# Altium PCB PCB1.PcbDoc
Units mm, origin at the board's own origin, x right, y up, seen from the top; angles counter-clockwise.
Board outline 152.4 x 101.6 mm, 2 copper layers (Top Layer, Bottom Layer); 34 components, 23 nets, 104 pads, 0 vias.
Unrouted connection lines stored in the file: 72.
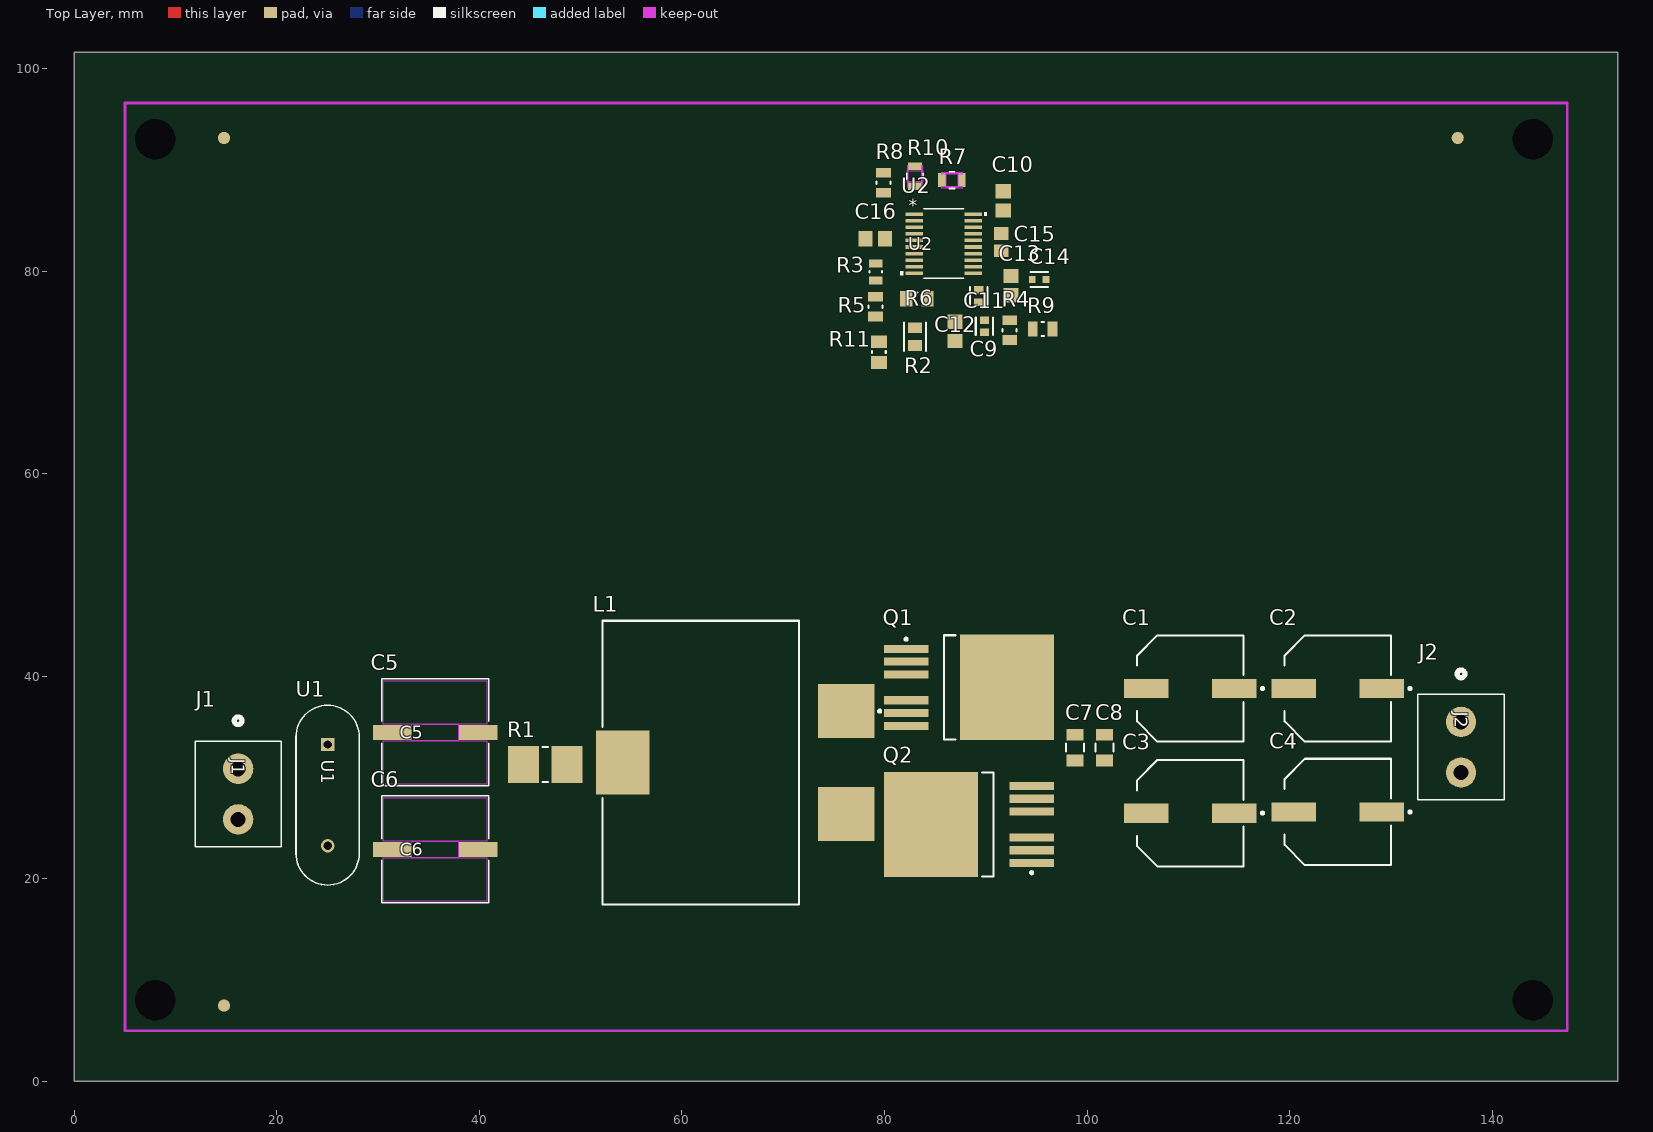
[diagram p0: Top Layer view]
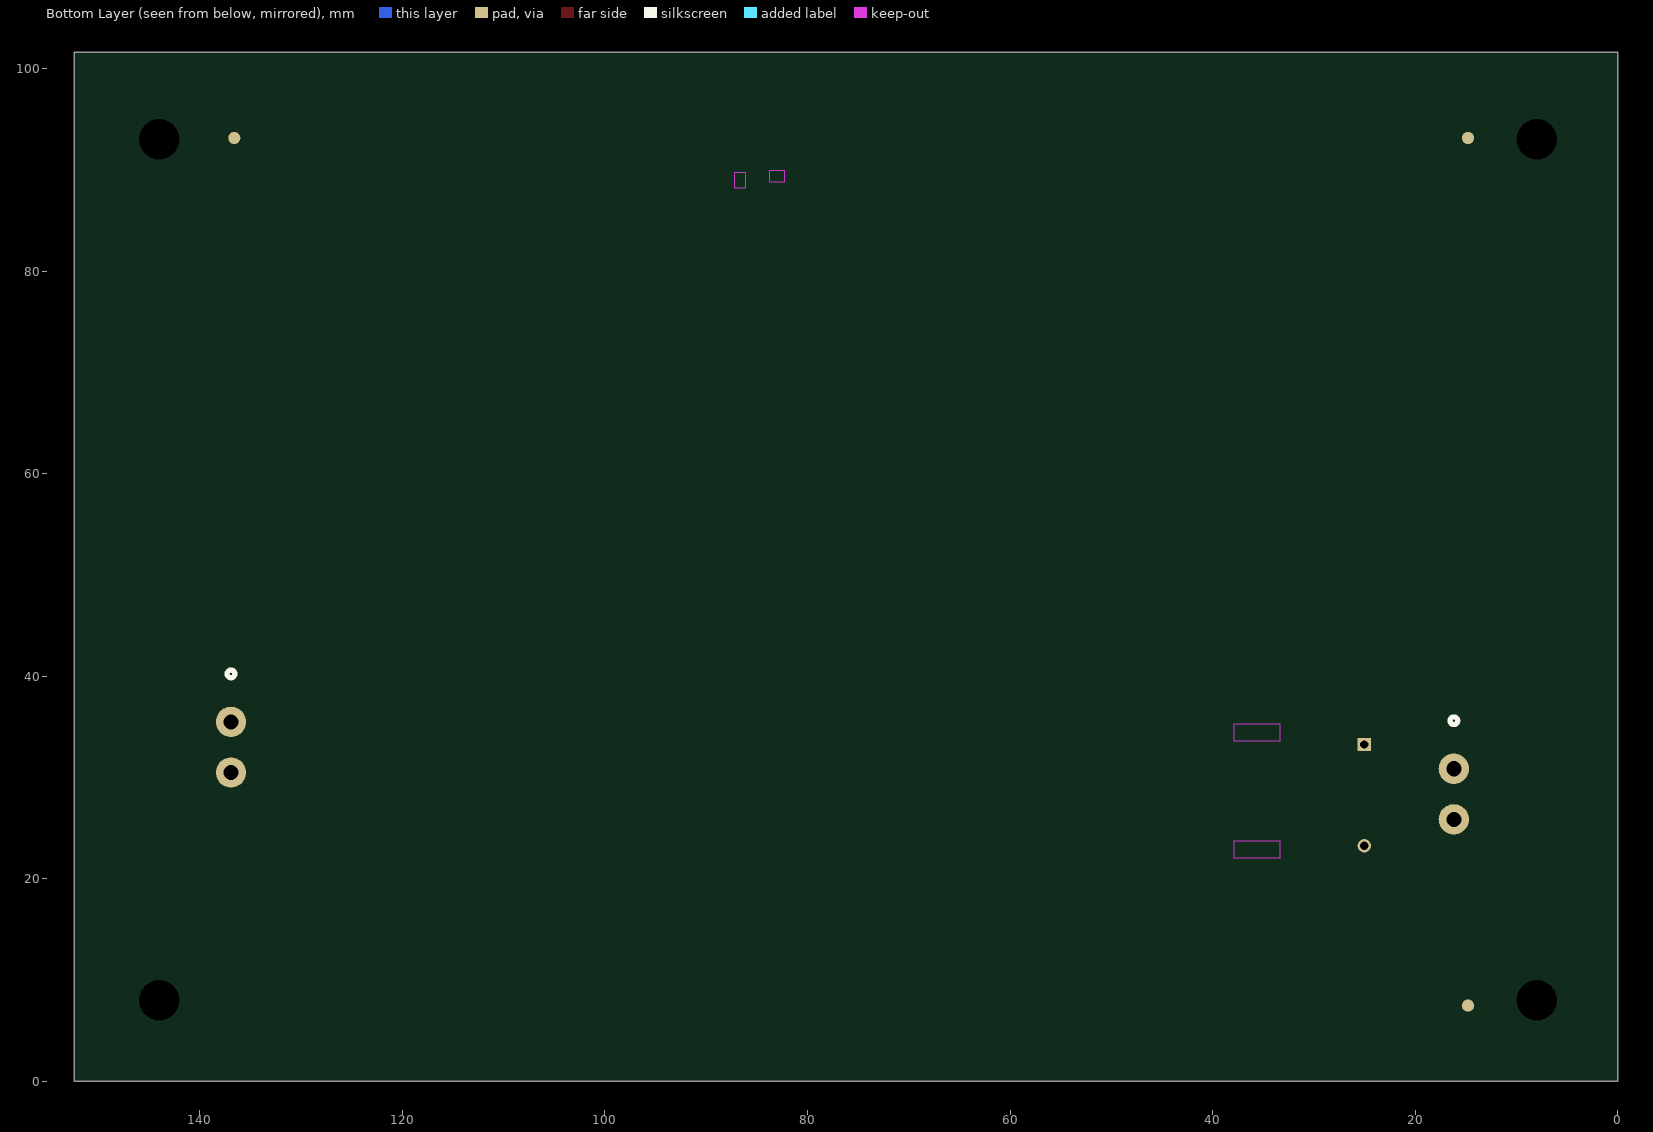
[diagram p1: Bottom Layer view, seen from below]

## Layer stack, top to bottom
Top Solder: solder mask 0.0102, Solder Resist, Dk 3.5
Top Layer: signal copper 0.0356
Dielectric 1: dielectric 0.32, FR-4, Dk 4.8
Bottom Layer: signal copper 0.0356
Bottom Solder: solder mask 0.0102, Solder Resist, Dk 3.5

## Board outline
0,0 152.4,0 152.4,101.6 0,101.6

## Design rules (kind name [scope] priority, off if disabled: settings)
Clearance [All] p1: gap=0.3 ignorepadtopadclearanceinfootprint=FALSE
HoleSize [All] p1: absolutevalues=TRUE maxlimit=6 minlimit=0.5 maxpercent=80.000 minpercent=20.000
PolygonConnect [All] p1: connectstyle=Relief reliefconductorwidth=0.254 reliefentries=4 polygonreliefangle="90 Angle" airgapwidth=0.254
RoutingVias [All] p1: holewidth=0.3 width=0.6 viastyle="Through Hole" minholewidth=0.25 minwidth=0.5 maxholewidth=2.5 maxwidth=5
SolderMaskExpansion [All] p1: expansion=0.12 istentingtop=FALSE
SupplyNets "Schematic Supply Nets_1" [InNet('GND')] p1: voltage=0.000
Width [All] p1: maxlimit=10 minlimit=0.254 preferedwidth=0.3 minimp=50.000000 maximp=50.000000 favimp=50.000000
29 further rules are at their usual default settings.

## Components (designator, comment, footprint, x,y, rotation, side; value= is the part's Value field where it differs from the comment)
C1 "35SVPF120M" FP-OS-CON-SMT-F12-MFG 110.204,38.786 r180 top
C2 "35SVPF120M" FP-OS-CON-SMT-F12-MFG 124.756,38.786 r180 top
C3 "35SVPF120M" FP-OS-CON-SMT-F12-MFG 110.204,26.467 r180 top
C4 "35SVPF120M" FP-OS-CON-SMT-F12-MFG 124.756,26.594 r180 top
C5 "UCD1V471MNL6GS" CAP_UCD_10X13P5_NCH 35.636,34.442 r0 top
C6 "UCD1V471MNL6GS" CAP_UCD_10X13P5_NCH 35.636,22.885 r0 top
C7 "GRM31CR71H475KA12L" FP-GRM31C-0_2-e0_3_0_8-IPC_C 98.806,32.944 r270 top
C8 "GRM31CR71H475KA12L" FP-GRM31C-0_2-e0_3_0_8-IPC_C 101.727,32.944 r270 top
C9 "C0603C223K5RACTU" FP-C0603C-CF-MFG 89.865,74.559 r270 top value="22,000 pF"
C10 "GRM21BR71H104KA01L" CAPC2013X135X45ML10T25 91.719,86.929 r90 top
C11 "C0603C331K5RACTU" FP-C0603C-CF-MFG 89.306,77.537 r270 top value="330 pF"
C12 "GRM21BR71H104KA01L" CAPC2013X135X45ML10T25 86.97,74.041 r90 top
C13 "GRM21BR71H104KA01L" CAPC2013X135X45ML10T25 92.481,78.562 r90 top
C14 "GRM188R71E474KA12D" FP-GRM188-0_1-e0_2_0_5-MFG 95.275,79.172 r180 top
C15 "GRM21BR71E105KA99L" CAPC2013X140X45NL15T25 91.516,82.855 r90 top
C16 "GRM21BR71H104KA01L" CAPC2013X135X45ML10T25 79.085,83.185 r0 top
J1 "1729018" CONN_1729018_PXC 16.18,30.857 r270 top
J2 "1729018" CONN_1729018_PXC 136.931,35.484 r270 top
L1 "7443641500" WE-HCF_2818 61.873,31.47 r90 top
Q1 "IPB017N06N3 G" INF-PG-TO-263-7-2_N 88.332,38.887 r0 top
Q2 "IPB017N06N3 G" INF-PG-TO-263-7-2_N 88.332,25.349 r180 top
R1 "WSLP25122L000FEA" FP-WSLP2512-0R001-0R0049-MFG 46.507,31.267 r0 top
R2 "CR0805-FX-1913ELF" FP-CR0805-IPC_B 83.007,73.521 r270 top
R3 "CRCW080549K9FKEA" FP-CRCW0805-e3-IPC_C 79.146,79.908 r270 top
R4 "CRCW080568K1FKEA" FP-CRCW0805-e3-MFG 92.354,74.168 r270 top
R5 "CRCW08058K06FKEA" FP-CRCW0805-e3-MFG 79.121,76.489 r270 top
R6 "CRCW080510K0FKEA" FP-CRCW0805-e3-IPC_A 83.194,77.267 r0 top
R7 "CRCW08054R70FKEAHP" RES_CRCW_0805_VIS 86.665,88.976 r0 top
R8 "CRCW0805100KFKEA" FP-CRCW0805-e3-MFG 79.908,88.722 r90 top
R9 "CRCW08058K06FKEA" FP-CRCW0805-e3-MFG 95.615,74.27 r180 top
R10 "CRCW08054R70FKEAHP" RES_CRCW_0805_VIS 83.007,89.357 r90 top
R11 "CRCW080536K5FKEA" RESC2013X50X30ML20T20 79.451,71.993 r90 top
U1 "MF72-001.5D15" MF72-001.5D15_CTM 25.019,28.245 r270 top
U2 "LM5122QMHX/NOPB" PWP20_3P0X4P2-M 85.847,82.702 r0 top

## Footprints (in the part's own frame and the unit in brackets; to place one, negate y for a bottom-side part, rotate by r counter-clockwise, add the part's x,y. Pads: shape width x height; smd on the part's side, far side on the other; paste and mask are expansions set on the pad)
CAP_UCD_10X13P5_NCH [mil]
  rect 150x59 smd paste+0 mask+0: 1(-167.5,0) 2(167.5,0)
  Top Layer keep-out region: -90.5,-31.5 -90.5,31.5 90.5,31.5 90.5,-31.5
  Top Layer keep-out region: -201,31.5 -201,201 201,201 201,31.5
  Top Layer keep-out region: -201,-201 -201,-31.5 201,-31.5 201,-201
  Keep-Out Layer region: -90.5,-31.5 -90.5,31.5 90.5,31.5 90.5,-31.5
  silkscreen extent -208,-208 208,208, body extent -222,-203 222,203, height 553
CAPC2013X135X45ML10T25 [mm] "Chip Capacitor, 2-Leads, Body 2.10x1.35mm, IPC Low Density"
  rect 1.4x1.5 smd: 1(-0.95,0) 2(0.95,0)
  body extent -1.05,-0.67 1.05,0.67, height 1.35
CAPC2013X140X45NL15T25 [mm] "Chip Capacitor, 2-Leads, Body 2.00x1.25mm, IPC Medium Density"
  rect 1.25x1.45 smd: 1(-0.85,0) 2(0.85,0)
  body extent -1.08,-0.7 1.07,0.7, height 1.4
CONN_1729018_PXC [mm]
  round 3 hole 1.5 paste-2539.97 mask+0: 1(0,0) 2(5,0)
  silkscreen extent -5.12,-4.25 7.71,4.25
FP-C0603C-CF-MFG [mm]
  rect 0.75x0.9 smd paste+0 mask+0: 1(-0.6,0) 2(0.6,0)
  silkscreen extent -0.87,-0.85 0.88,0.85, body extent -1.2,-0.6 1.2,0.6, height 0.25
FP-CR0805-IPC_B [mm]
  rect 1.058x1.362 smd paste+0 mask+0: 1(-0.877,0) 2(0.877,0)
  silkscreen extent -1.41,-1.08 1.41,1.08, body extent -1.66,-0.93 1.66,0.93, height 0.25
FP-CRCW0805-e3-IPC_A [mil]
  rect 47.5x59.38 smd paste+0 mask+0: 1(-41.37,0) 2(41.37,0)
  silkscreen extent -3,-25 3,25, body extent -85,-49 85,49, height 10
FP-CRCW0805-e3-IPC_C [mil]
  rect 31.75x51.5 smd paste+0 mask+0: 1(-33.5,0) 2(33.5,0)
  silkscreen extent -3,-25 3,25, body extent -53,-31 53,31, height 10
FP-CRCW0805-e3-MFG [mm]
  rect 0.95x1.45 smd paste+0 mask+0: 1(-0.975,0) 2(0.975,0)
  silkscreen extent -0.13,-0.7 0.13,0.7, body extent -1.55,-0.82 1.55,0.82, height 0.25
FP-GRM31C-0_2-e0_3_0_8-IPC_C [mm]
  rect 1.155x1.706 smd paste+0 mask+0: 1(-1.276,0) 2(1.276,0)
  silkscreen extent -0.4,-0.9 0.4,0.9, body extent -1.95,-1 1.95,1, height 0.25
FP-GRM188-0_1-e0_2_0_5-MFG [mm]
  rect 0.65x0.7 smd paste+0 mask+0: 1(-0.675,0) 2(0.675,0)
  silkscreen extent -0.85,-0.75 0.85,0.75, body extent -1.1,-0.55 1.1,0.55, height 0.25
FP-OS-CON-SMT-F12-MFG [mm]
  rect 4.4x1.9 smd paste+0 mask+0: 1(-4.35,0) 2(4.35,0)
  silkscreen extent -7.25,-5.25 5.25,5.25, body extent -6.8,-5.5 6.8,5.5, height 0.25
FP-WSLP2512-0R001-0R0049-MFG [mm]
  rect 3.05x3.68 smd paste+0 mask+0: 1(-2.16,0) 2(2.16,0)
  silkscreen extent -0.26,-1.72 0.26,1.72, body extent -3.78,-1.94 3.78,1.94, height 0.25
INF-PG-TO-263-7-2_N [mm] "DPAK, 7-Leads, Body 10.1x8.98mm, Pitch 1.27mm, IPC Medium Density"
  rect 4.4x0.8 smd: 1(-6.2,3.81) 2(-6.2,2.54) 3(-6.2,1.27) 5(-6.2,-1.27) 6(-6.2,-2.54) 7(-6.2,-3.81)
  rect 9.3x10.4 smd: 4(3.75,0)
  silkscreen extent -6.32,-5.15 -1.3,5.15, body extent -2.45,-5.15 7,5.15, height 4.57
MF72-001.5D15_CTM [mil]
  rect 52x52 hole 32 paste-99999 mask+0: 1(-196.85,0)
  round 52 hole 32 paste-99999 mask+0: 2(196.85,0)
  silkscreen extent -349,-123 349,123
PWP20_3P0X4P2-M [mm]
  rect 1.716x0.351 smd paste+0 mask+0: 1(-2.901,2.925) 2(-2.901,2.275) 3(-2.901,1.625) 4(-2.901,0.975) 5(-2.901,0.325) 6(-2.901,-0.325) 7(-2.901,-0.975) 8(-2.901,-1.625) 9(-2.901,-2.275) 10(-2.901,-2.925) 11(2.901,-2.925) 12(2.901,-2.275) 13(2.901,-1.625) 14(2.901,-0.975) 15(2.901,-0.325) 16(2.901,0.325) 17(2.901,0.975) 18(2.901,1.625) 19(2.901,2.275) 20(2.901,2.925)
  silkscreen extent -4.27,-3.43 4.27,3.43, body extent -3.2,-3.3 3.2,3.3, height 1.1
RES_CRCW_0805_VIS [mil]
  rect 30x55 smd paste+0 mask+0: 1(-38.5,0) 2(38.5,0)
  Top Layer keep-out region: -41.5,-25.5 -41.5,-29.5 41.5,-29.5 41.5,-25.5
  Top Layer keep-out region: -41.5,29.5 -41.5,25.5 41.5,25.5 41.5,29.5
  Top Layer keep-out region: -21.5,-29.5 -21.5,29.5 21.5,29.5 21.5,-29.5
  Keep-Out Layer region: -21.5,-29.5 -21.5,29.5 21.5,29.5 21.5,-29.5
  silkscreen extent -11,-32 11,32, body extent -44,-27 44,27, height 20
RESC2013X50X30ML20T20 [mm] "Chip Resistor, 2-Leads, Body 2.00x1.25mm, IPC Low Density"
  rect 1.25x1.55 smd: 1(-1.025,0) 2(1.025,0)
  silkscreen extent -0.1,-0.67 0.1,0.67, body extent -1.1,-0.72 1.1,0.72, height 0.5
WE-HCF_2818 [mm] "SMD High Current Inductor, body 28x19.4mm"
  rect 5.33x5.59 smd: 1(-5.075,-14.355) 2(5.075,-14.355)
  rect 6.35x5.28 smd: 3(0,7.72)
  silkscreen extent -14,-17.77 14,9.7, body extent -14,-16.4 14,10.6, height 18.55

## Part data
C1 C2 C3 C4: library part CMP-05428-000082-1, "Conductive Polymer Aluminum Solid Capacitors (OS-CON) 120uF ±20% 35V RADIAL SMT 10x12.6mm", Capacitance=120uF, Case/Package=Radial, ESR (Equivalent Series Resistance)=18mR, Leakage Current=840uA, Max Operating Temperature=105°C, Min Operating Temperature=-55°C, Package Quantity=400, Ripple Current=4.4A, Tolerance=20%, Voltage=35V, Diameter=10mm, Dissipation Factor=12%, Height=12.6mm, Height - Seated (Max)=0.5inch, Lead Free="Lead Free", Length=12.6mm, Life (Hours)=5000Hour, Mount="Surface Mount", Number of Pins=12, Packaging="Tape and Reel", Polarity=Polar, REACH SVHC="No SVHC", Ripple Current (AC)=4.4A, RoHS Compliant=Yes, Series="OS-CON™, SVPF", Termination=SMD/SMT, Voltage Rating=35V, Voltage Rating (DC)=35V
C5 C6: "No Description Available", Manufacturer_Name=Nichicon, Copyright="Copyright (C) 2026 Ultra Librarian. All rights reserved.", Manufacturer_Part_Number=UCD1V471MNL6GS
C7 C8: library part CMP-1037-04923-3, "Chip Multilayer Ceramic Capacitors for General Purpose, 1206, 4.7uF, X7R, 15%, 10%, 50V", Capacitance=4.7uF, Case Code (Imperial)=1206, Case Code (Metric)=3216, Dielectric=X7R, Max Operating Temperature=125°C, Min Operating Temperature=-55°C, Package Quantity=2000, Tolerance=10%, Voltage=50V, Case/Package=1206, Depth=1.6mm, Height=1.6mm, Lead Free="Lead Free", Length=3.2mm, Material=Ceramic, Mount="Surface Mount", Packaging="Tape and Reel", Radiation Hardening=No, REACH SVHC="No SVHC", Termination=SMD/SMT, Thickness=0.071inch, Voltage Rating=50V, Voltage Rating (DC)=50V, Width=0.063inch
C9: library part CMP-2006-03879-3, "Ceramic Capacitor 0.022Uf 50V, X7R, 10%, 0603, Full Reel", Capacitance="22,000 pF", Manufacturer=KEMET, Package=C0603C-CF, Temperature="-55°C to +125°C", Temperature Characteristic=X7R, Temperature Coefficient=30ppm/°C, Temperature Range High=+125°C, Temperature Range Low=-55°C, Tolerance=0.1, Voltage Rating="50 V", Automotive=Yes, Automotive Grade="Grade 1", Category=Cap, ComponentLink2Description=Datasheet, ComponentLink2URL=https://api.kemet.com/component-edge/download/datasheet/C0603C100J5GACAUTO.pdf, Device Class L1="Passive Components", Device Class L2=Capacitors, Device Class L3="Ceramic Capacitors", Digikey Description="Ceramic Capacitor 0.022Uf 50V, X7R, 10%, 0603, Full Reel", Height=0.87mm, Lead Free=Yes, Manufacturer Part Number=C0603C223K5RACTU, Material=Ceramic, Mouser Description="Capacitor; Ceramic; Cap; .022uF; Tol+10%; SMT; Vol-Rtg 50V; X7R; TR", Octopart=https://octopart.com/c0603c223k5ractu-kemet-97352, RoHS=TRUE
C10 C12 C13 C16: library part CMP-2100-03644-1, "Chip Capacitor, 0.1 uF, +/- 10%, 50 V, -55 to 125 degC, 0805 (2012 Metric), RoHS, Tape and Reel", Capacitance=100nF, Case Code (Imperial)=0805, Case Code (Metric)=2012, Dielectric=X7R, Dielectric Material=Ceramic, Insulation Resistance=10GR, Manufacturer=Murata, Max Operating Temperature=125degC, Min Operating Temperature=-55degC, Package Description="2-Pin Surface Mount Device, Body 2 x 1.25 mm", Package Quantity=1, Tolerance=10%, Voltage=50V, Case/Package=0805, Datasheet URL=http://psearch.en.murata.com/capacitor/product/GRM21BR71H104KA01%23.pdf, Datasheet Version=42675.0, Depth=1.25mm, Height=1.25mm, Lead Free=LeadFree, Length=2mm, Manufacturer URL=http://www.murata.com/, Material=Ceramic, Mount=SurfaceMount, Number of Pins=2, Package Reference=0805, Packaging=TapeandReel, Radiation Hardening=No, REACH SVHC=Unknown, RoHSCompliant=true, Termination=SMD/SMT, Thickness=0.053inch, Voltage Rating=50V, Voltage Rating (DC)=50V, Width=0.049inch
C11: library part CMP-2006-03173-2, "CAP CER 330PF 50V X7R 0603", Capacitance="330 pF", Manufacturer=KEMET, Package=C0603C-CF, Temperature="-55°C to +125°C", Temperature Characteristic=X7R, Temperature Coefficient=30ppm/°C, Temperature Range High=+125°C, Temperature Range Low=-55°C, Tolerance=0.1, Voltage Rating="50 V", Automotive=Yes, Automotive Grade="Grade 1", Category=Cap, ComponentLink2Description=Datasheet, ComponentLink2URL=https://api.kemet.com/component-edge/download/datasheet/C0603C100J5GACAUTO.pdf, Device Class L1="Passive Components", Device Class L2=Capacitors, Device Class L3="Ceramic Capacitors", Digikey Description="CAP CER 330PF 50V X7R 0603", Height=0.87mm, Lead Free=Yes, Manufacturer Part Number=C0603C331K5RACTU, Material=Ceramic, Mouser Description="Multilayer Ceramic Capacitors MLCC - SMD/SMT 50volts 330pF X7R 10%", Octopart=https://octopart.com/c0603c331k5ractu-kemet-132411, RoHS=TRUE
C14: library part CMP-06035-003857-1, "Chip Multilayer Ceramic Capacitors for General Purpose, 0603, 0.47uF, X7R, 15%, 10%, 25V", Capacitance=470nF, Case Code (Imperial)=0603, Case Code (Metric)=1608, Dielectric=X7R, Max Operating Temperature=125°C, Min Operating Temperature=-55°C, Package Quantity=4000, Tolerance=10%, Voltage=50V, Voltage Rating=25V, Case/Package=0603, Depth=0.8mm, Height=0.8mm, Lead Free="Lead Free", Length=1.6mm, Material=Ceramic, Mount="Surface Mount", Number of Pins=2, Packaging="Tape and Reel", REACH SVHC="No SVHC", Termination=SMD/SMT, Thickness=0.035inch, Voltage Rating (DC)=25V, Width=0.031inch
C15: library part CMP-2007-03403-1, Manufacturer=Murata, Part Number=GRM21BR71E105KA99L
J1 J2: "PCB terminal block, nominal current: 13.5 A, nom. voltage: 400 V, pitch: 5 mm, number of positions: 2, connection method: Screw connection with tension sleeve, mounting: Wave soldering, conductor/PCB connection direction: 0 Â°, color: green", Manufacturer_Name="Phoenix Contact", Copyright="Copyright (C) 2025 Ultra Librarian. All rights reserved.", Manufacturer_Part_Number=1729018, RefDes=RefDes, Type=Type
L1: library part CMP-1378-00012-4, "PowerChoke Shielded Wirewound 15uH 15% 100KHz Ferrite 30A 0.00264Ohm DCR Automotive Tray", Ambient Temperature Range High=75°C, Ambient Temperature Range Low=-40°C, Case/Package=Nonstandard, Current Rating=30A, DC Resistance (DCR)=2.4mΩ, Inductance=15µH, Inductance Tolerance=15%, Max Operating Temperature=125°C, Saturation Current=22A, Self Resonant Frequency=11MHz, Test Frequency=100kHz, Composition=Wirewound, Core Material=Ferrite, Height=18.5mm, Height - Seated (Max)=18.4912mm, Length=27mm, Max DC Current=30A, Min Operating Temperature=-40°C, Mount="Surface Mount", Number of Pins=2, Packaging="Cut Tape", REACH SVHC=Unknown, RMS Current (Irms)=30A, RoHS=Compliant, Series Resistance=2.4mΩ, Shielding=Shielded, Termination=SMD/SMT, Tolerance=15%, Width=28mm
Q1 Q2: library part CMP-1091-00282-1, "N-Channel OptiMOS 3 Power-Transistor, 60 V VDS, 180 A ID, -55 to 175 degC, PG-TO-263-7-2, Reel, Green", Manufacturer=Infineon, ComponentLink1Description="Manufacturer URL", ComponentLink1URL=http://www.infineon.com/, ComponentLink2Description=Datasheet, ComponentLink2URL=http://www.infineon.com/dgdl/IPB017N06N3_Rev2.2.pdf?folderId=db3a30431441fb5d01148ca9f1be0e77&fileId=db3a30431ddc9372011e264a7ab746ea, ComponentLink3Description="Package Specification", ComponentLink3URL=http://www.infineon.com/dgdl/BTS621L1_20030922.pdf?folderId=db3a30431400ef68011421b54e2e0564&fileId=db3a304333227b5e0133258247c72ecc&sId=db3a30433d68e984013d8539603e0d72, DatasheetVersion="Rev. 2.2", Green=TRUE, Halogen-free=TRUE, ID (max)="180Â A", IDpuls (max)="720Â A", Mounting Technology="Surface Mount", PackageDescription="7-Pin Plastic (Green) Transistor Single Outline Package, 10.1 x 8.98 mm Body, 1.27 mm Pitch", PackageReference=PG-TO-263-7-2, PackageVersion="Rev. 01, 11/2007", Packing=Reel, PartNumber="IPB017N06N3 G", Polarity=N, Ptot (max)="250Â W", QG="206Â nC", RDS (on) (max)="1.7Â mOhm", Rth="0.6Â K/W", RthJA (max)="62 K/W", RthJC (max)="0.6Â K/W", VDS (max)="60Â V", VGS(th) (max)="4Â V", VGS(th) (min)="2Â V"
R1: library part CMP-02407-010958-1, "RES 0.002 OHM 1% 3W 2512", Case Code (Imperial)=2512, Case Code (Metric)=6432, Max Operating Temperature=170°C, Min Operating Temperature=-65°C, Package Quantity=2000, Power Rating=3W, Resistance=2MR, Resistor Type="Metal Strip", Temperature Coefficient=275ppm/°C, Tolerance=1%, Case/Package=2512, Height=0.635mm, Lead Free="Lead Free", Length=6.4mm, Mount="Surface Mount", Packaging="Tape and Reel", RoHS Compliant=Yes, Series=WSLP, Size Code=2512, Termination=SMD/SMT, Weight=0.001429oz, Width=3.2mm
R2: library part CMP-07231-000644-1, "Thick Film Chip Resistors 0805 191kΩ 0.125W 1% 100ppm/°C", Case Code (Imperial)=0805, Case Code (Metric)=2012, Max Operating Temperature=155°C, Min Operating Temperature=-55°C, Package Quantity=5000, Power Rating=125mW, Resistance=191kR, Temperature Coefficient=100ppm/°C, Tolerance=1%, Voltage Rating=150V, Case/Package=0805, Composition="Thick Film", Contact Plating=Tin, Depth=1.25mm, Height=0.5mm, Length=2mm, Military Standard=Not, Mount="Surface Mount", Packaging="Tape and Reel", Termination=SMD/SMT, Thickness=508um, Width=1.25mm
R3: library part CMP-2001-03952-2, "RES Thick Film, 49.9kΩ, 1%, 0.125W, 100ppm/°C, 0805", Case Code (Imperial)=0805, Case Code (Metric)=2012, Max Operating Temperature=155°C, Max Power Dissipation=125mW, Min Operating Temperature=-55°C, Package Quantity=10, Resistance=49.9kR, Temperature Coefficient=100ppm/°C, Tolerance=1%, Voltage Rating=150V, Case/Package=0805, Composition="Thick Film", Contact Plating=Tin, Depth=1.25mm, Features="Automotive AEC-Q200", Height=0.45mm, Lead Free="Lead Free", Length=2mm, Military Standard=Not, Mount="Surface Mount", Number of Terminations=2, Packaging="Tape and Reel", Power Rating=125mW, Radiation Hardening=No, Termination=SMD/SMT, Voltage Rating (DC)=150V, Weight=0.000194oz, Width=0.049inch
R4: library part CMP-2001-04074-2, "RES Thick Film, 68.1kΩ, 1%, 0.125W, 100ppm/°C, 0805", Case Code (Imperial)=0805, Case Code (Metric)=2012, Max Operating Temperature=155°C, Max Power Dissipation=125mW, Min Operating Temperature=-55°C, Package Quantity=10, Resistance=68.1kR, Resistance Tolerance=1%, Resistor Type="Thick Film", Temperature Coefficient=100ppm/°C, Voltage Rating=150V, Case/Package=0805, Construction=Rectangular, Contact Plating=Tin, Depth=1.25mm, Features="Automotive AEC-Q200", Height=0.45mm, Lead Free="Lead Free", Length=2mm, Military Standard=Not, Number of Pins=2, Number of Terminations=2, Packaging="Tape and Reel", Power Rating=125mW, Radiation Hardening=No, RoHS Compliant=Yes, Series=CRCW, Size Code=0805, Technology="THICK FILM", Termination=SMD/SMT, Tolerance=1%, Voltage Rating (DC)=150V, Weight=0.000194oz, Width=0.049inch
R5 R9: library part CMP-1013-00612-3, "RES Thick Film, 8.06kΩ, 1%, 0.125W, 100ppm/°C, 0805", Case Code (Imperial)=0805, Case Code (Metric)=2012, Max Operating Temperature=155°C, Max Power Dissipation=125mW, Min Operating Temperature=-55°C, Package Quantity=10, Resistance=8.06kR, Temperature Coefficient=100ppm/°C, Tolerance=1%, Voltage Rating=150V, Case/Package=0805, Composition="Thick Film", Contact Plating=Tin, Depth=1.25mm, Features="Automotive AEC-Q200", Height=0.45mm, Lead Free="Lead Free", Length=2mm, Military Standard=Not, Mount="Surface Mount", Number of Terminations=2, Packaging="Tape and Reel", Power Rating=125mW, Radiation Hardening=No, Termination=SMD/SMT, Voltage Rating (DC)=150V, Weight=0.000194oz, Width=0.049inch
R6: library part CMP-2001-04908-2, "RES Thick Film, 10kΩ, 1%, 0.125W, 100ppm/°C, 0805", Case Code (Imperial)=0805, Case Code (Metric)=2012, Max Operating Temperature=155°C, Min Operating Temperature=-55°C, Package Quantity=5000, Power Rating=125mW, Resistance=10kR, Temperature Coefficient=100ppm/°C, Tolerance=1%, Voltage Rating=150V, Case/Package=0805, Composition="Thick Film", Contact Plating=Tin, Depth=1.25mm, Height=0.45mm, Lead Free="Lead Free", Length=2mm, Military Standard=Not, Packaging="Tape and Reel", Radiation Hardening=No, Termination=SMD/SMT, Voltage Rating (DC)=150V, Weight=0.000194oz, Width=1.25mm
R7 R10: "CRCW0805-HP 100 4R7 1% ET1 E3", Manufacturer_Name=Vishay, Copyright="Copyright (C) 2025 Ultra Librarian. All rights reserved.", Manufacturer_Part_Number=CRCW08054R70FKEAHP
R8: library part CMP-2001-04899-2, "RES Thick Film, 100kΩ, 1%, 0.125W, 100ppm/°C, 0805", Case Code (Imperial)=0805, Case Code (Metric)=2012, Max Operating Temperature=155°C, Min Operating Temperature=-55°C, Package Quantity=5000, Power Rating=125mW, Resistance=100kR, Temperature Coefficient=100ppm/°C, Tolerance=1%, Voltage Rating=150V, Case/Package=0805, Composition="Thick Film", Contact Plating=Tin, Depth=1.25mm, Height=0.45mm, Lead Free="Lead Free", Length=2mm, Military Standard=Not, Mount="Surface Mount", Number of Pins=2, Packaging="Tape and Reel", Radiation Hardening=No, Termination=SMD/SMT, Voltage Rating (DC)=150V, Weight=0.000194oz, Width=1.25mm
R11: library part CMP-1013-00686-2, Manufacturer="Vishay Dale", Part Number=CRCW080536K5FKEA
U1: "Description", Manufacturer_Name=CANTHERM, Copyright="Copyright (C) 2026 Ultra Librarian. All rights reserved.", Manufacturer_Part_Number=MF72-001.5D15, RefDes=RefDes, Type=Type
U2: library part LM5122QMHXNOPB, "Automotive, 3-V to 65-V wide VIN, current mode synchronous boost controller with multiphase 20-HTSSOP -40 to 125", Manufacturer_Name="Texas Instruments", Copyright="Copyright (C) 2026 Ultra Librarian. All rights reserved.", Manufacturer_Part_Number=LM5122QMHX/NOPB, RefDes=RefDes, Type=Type

## Free pads (board coordinates)
  round 3.5 hole 4 unplated: 1(8,93) 2(144,93) 3(8,8) 4(144,8)
  round 1.2 all layers, no hole paste-0.6 mask+0.9: 5(14.783,93.142) 6(14.783,7.468) 7(136.601,93.142)

## Nets (pads, with @x,y where several pads share a name; then routed paths per layer and width w, separated by ;. In a path a pad name is that pad's centre, name@x,y a point inside that pad or via, vN(x,y) a via of type N, cw(c..) or ccw(c..) an arc to the next point about the centre after c; other vN are vias at no path point)
GND: C1.1 C2.1 C3.1 C4.1 C5.2 C6.2 C7.2 C8.2 C9.2 C11.2 C13.2 C14.2 C15.1 J1.2 J2.2 Q2.2 Q2.3 Q2.5 Q2.6 Q2.7 R5.2 R6.1 R8.2 R11.1 U2.9 U2.15
NetC1_2: C1.2 C2.2 C3.2 C4.2 C7.1 C8.1 J2.1 Q1.4 R2.2
NetC5_1: C5.1 C6.1 R1.1 U1.2 U2.4
NetC9_1: C9.1 R4.2
NetC10_1: C10.1 L1.2 Q1.2 Q1.3 Q1.5 Q1.6 Q1.7 Q2.4 U2.18
NetC10_2: C10.2 U2.20
NetC11_1: C11.1 R4.1 U2.11
NetC12_1: C12.1 R11.2 U2.8
NetC12_2: C12.2 U2.7
NetC13_1: C13.1 U2.14
NetC14_1: C14.1 R9.1
NetC15_2: C15.2 U2.13 U2.17
NetC16_1: C16.1 J1.1 R3.1 U1.1
NetC16_2: C16.2 U2.5
NetL1_1: L1.1 R1.2 U2.3
NetQ1_1: Q1.1 R7.1
NetQ2_1: Q2.1 R10.1
NetR2_1: R2.1 R6.2 U2.10
NetR3_2: R3.2 R5.1 U2.6
NetR7_2: R7.2 U2.19
NetR8_1: R8.1 U2.2
NetR9_2: R9.2 U2.12
NetR10_2: R10.2 U2.16
pads on no net: L1.3 U2.1

## Keep-outs
Top Layer:
  lines w0.254: 5,96.596 cw(c5,96.59) 5.007,96.59 5.007,4.995 147.395,4.995 ccw(c147.395,5) 147.4,5 147.4,96.6 cw(c147.396,96.6) 147.396,96.596 5,96.596

## Silkscreen, mask and mechanical layers (free items; w line width, h text height)
Mechanical 1:
  circle w0.254: c144,93 r4.75
  circle w0.254: c144,8 r4.75
  circle w0.254: c8,8 r4.75
  circle w0.254: c8,93 r4.75

## Text inside footprints (layer, text, board x,y; h text height)
U2: Top 3D Body "*" at 83.66,84.656 h1.27; Top Overlay "*" at 82.375,85.851 h1.27